# Altium PCB PCB1.PcbDoc
Units mm, origin at the board's own origin, x right, y up, seen from the top; angles counter-clockwise.
Board outline 100.08 x 100.08 mm, 2 copper layers (Top Layer, Bottom Layer); 116 components, 78 nets, 340 pads, 0 vias.
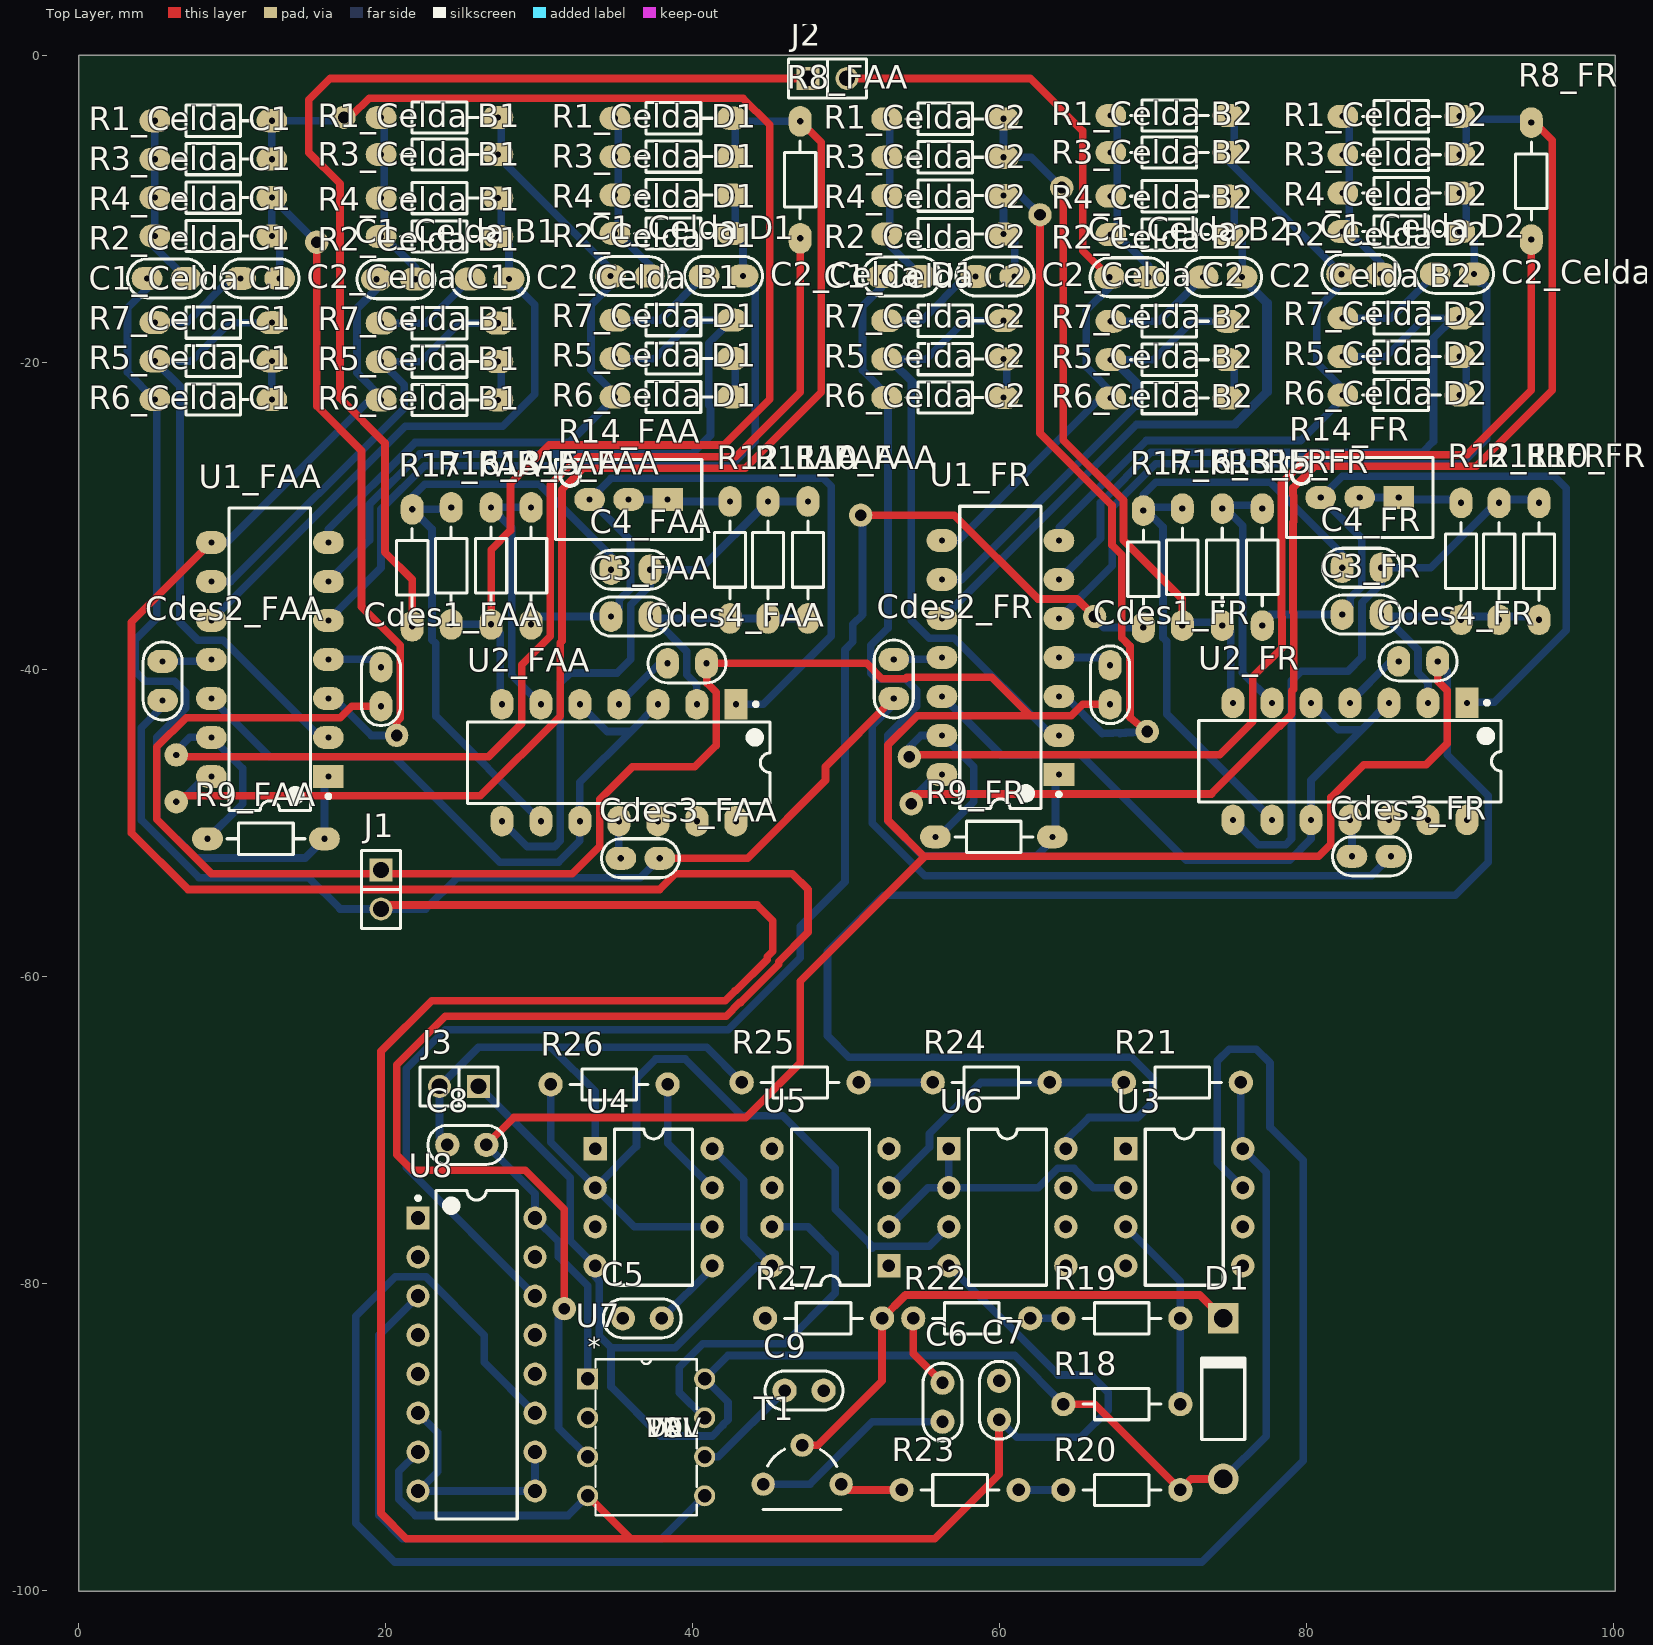
[diagram p0: Top Layer view]
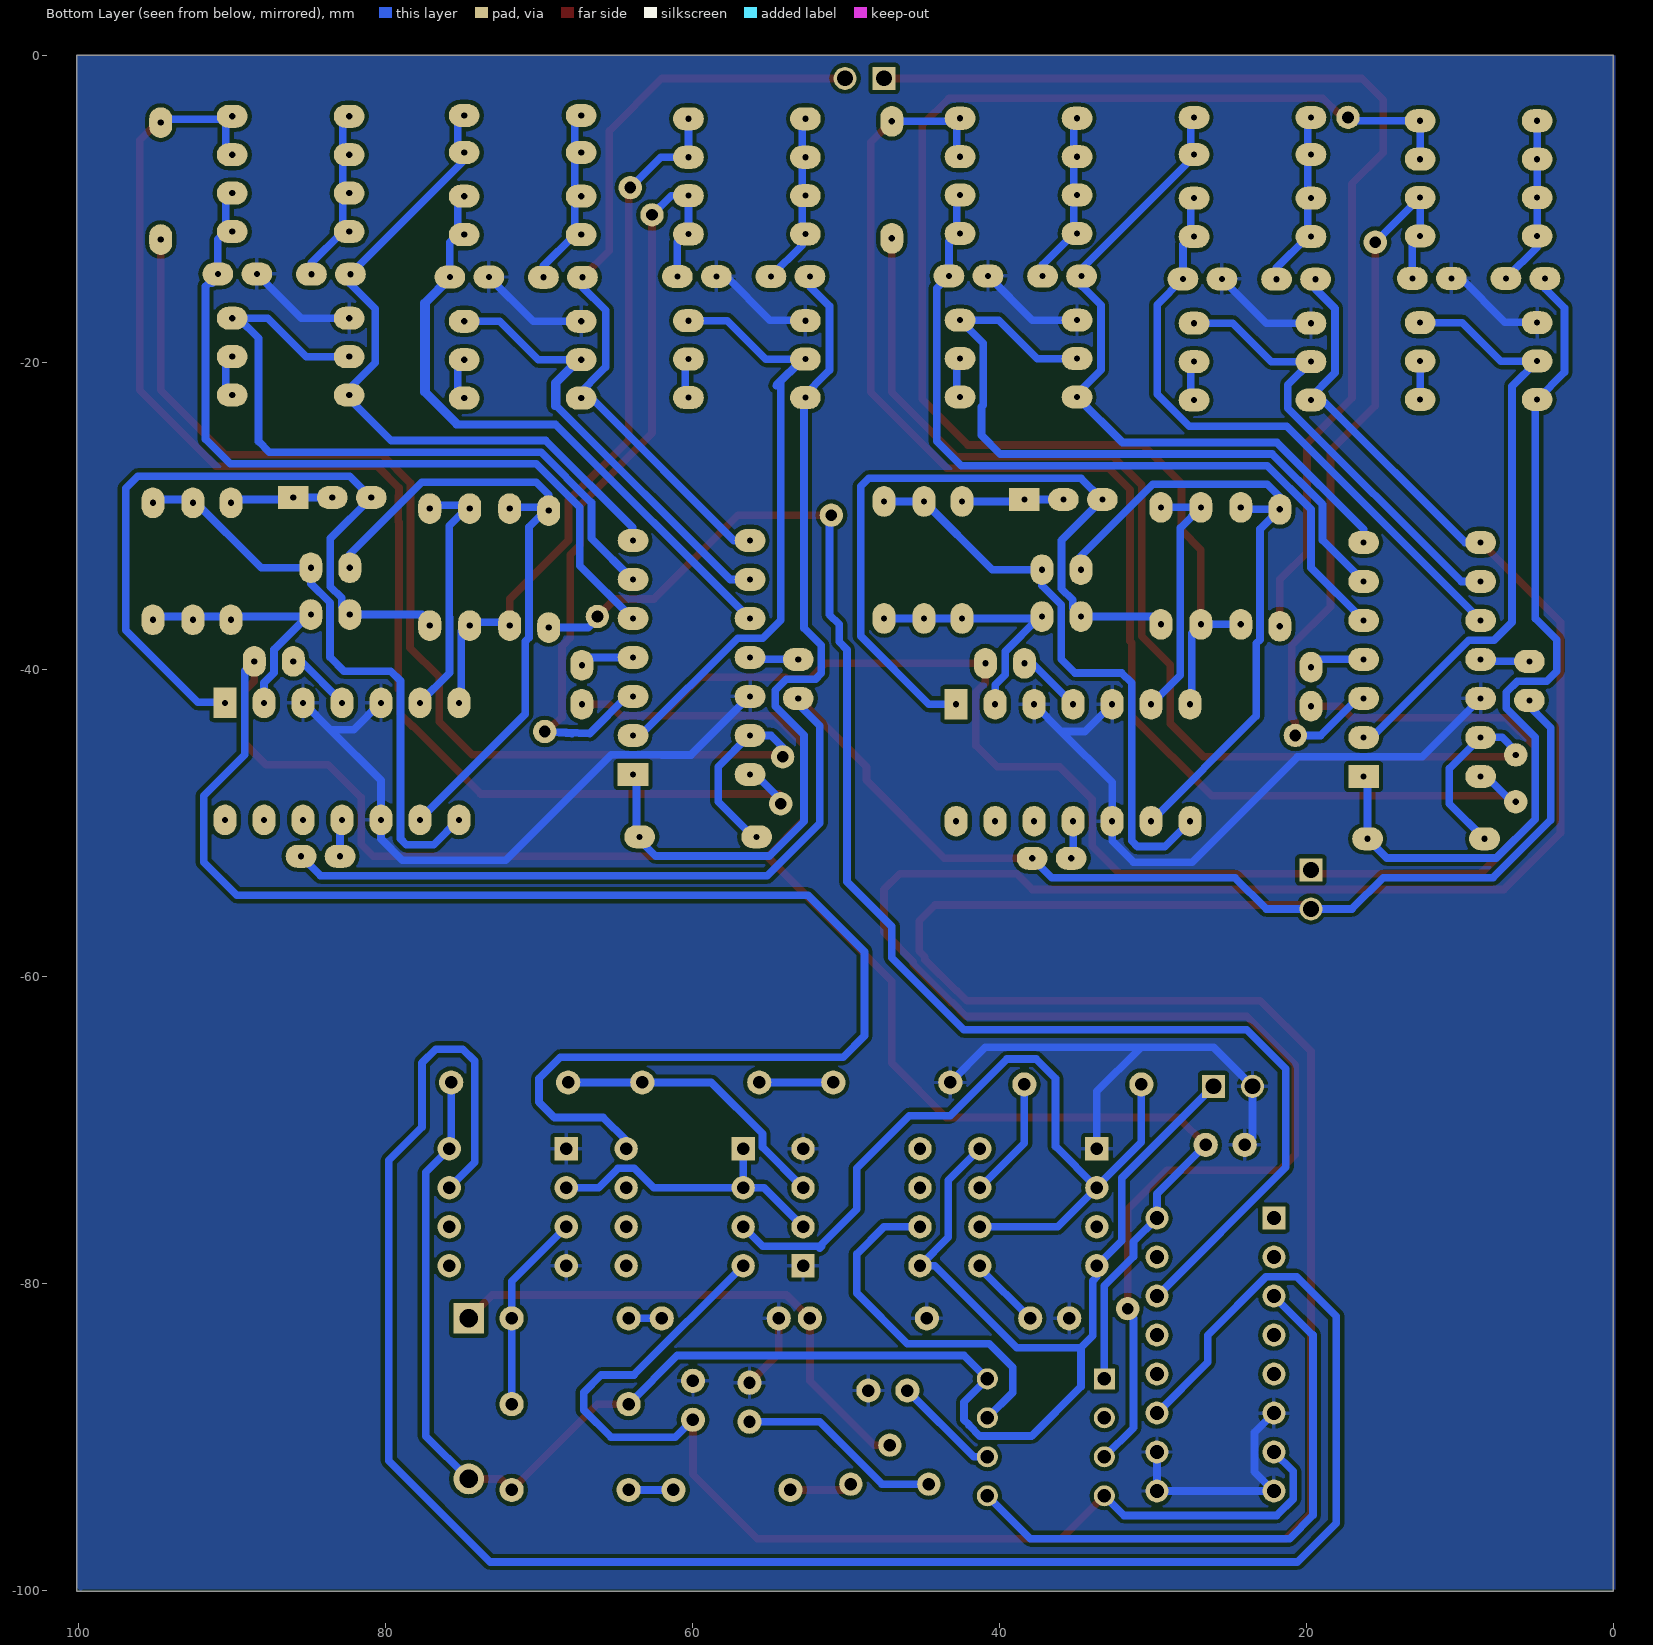
[diagram p1: Bottom Layer view, seen from below]
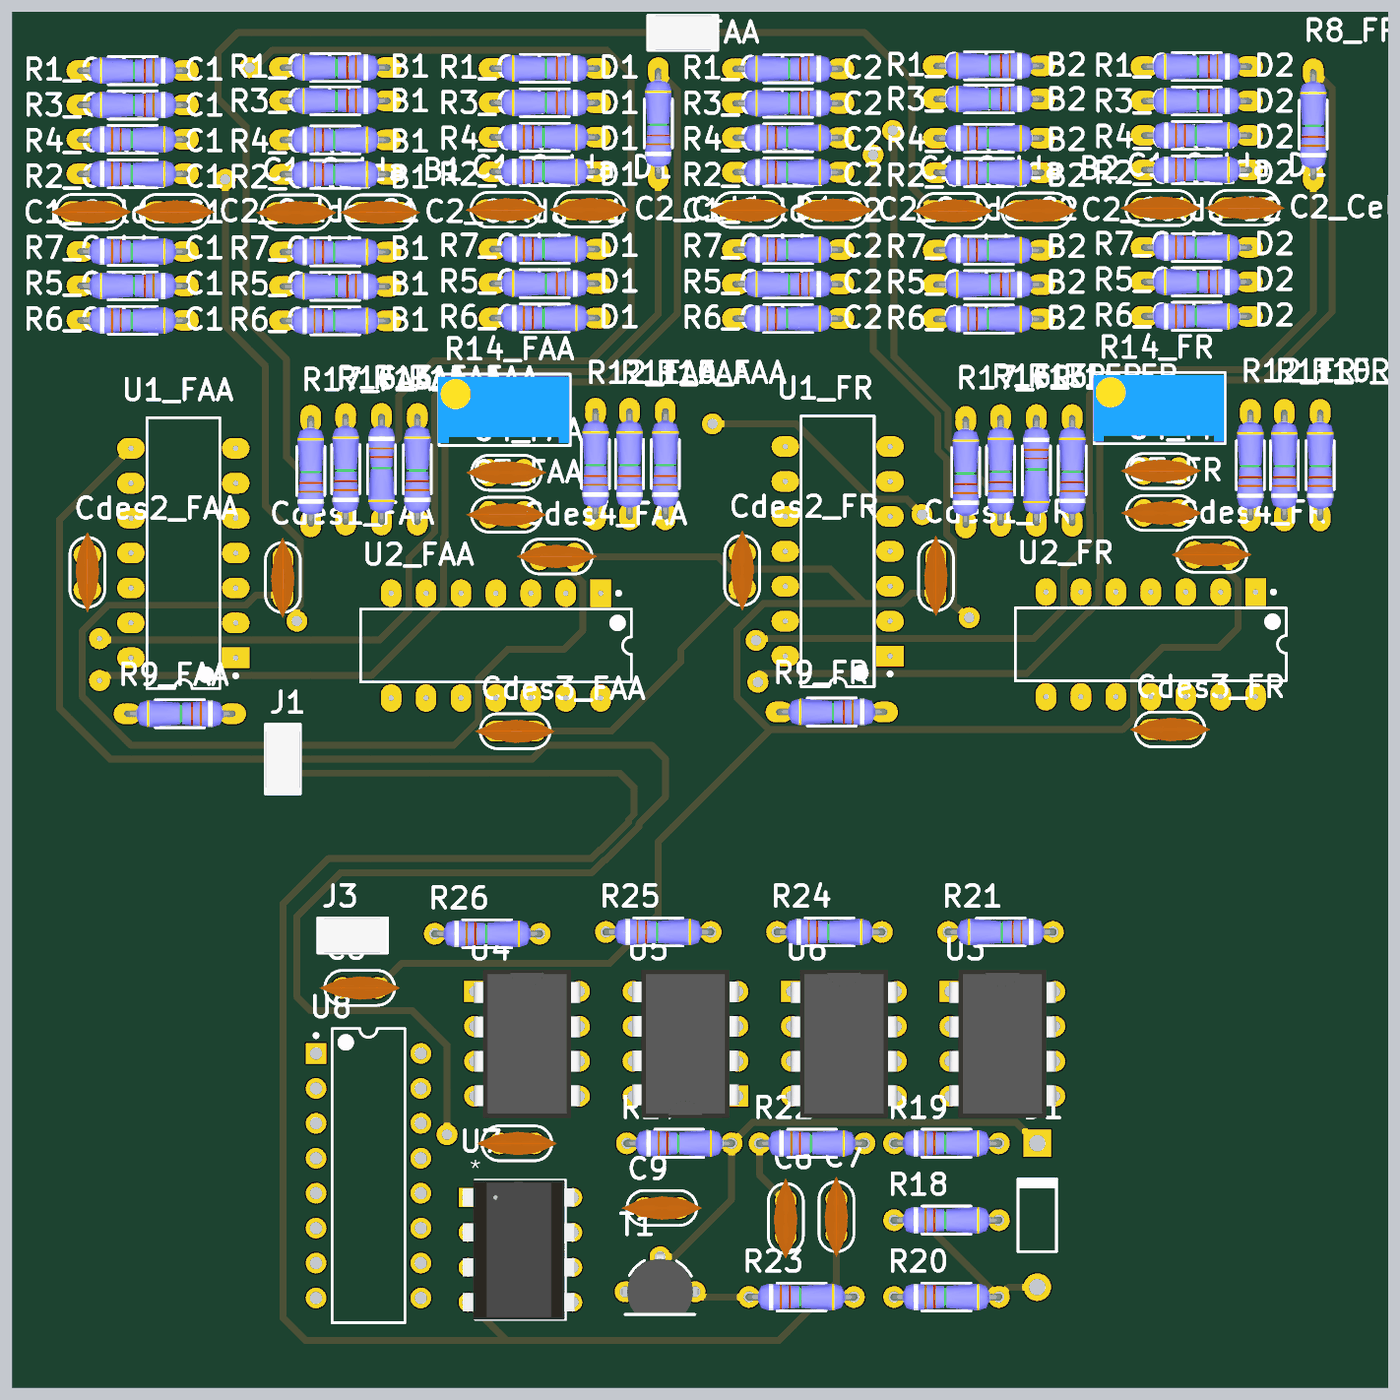
[diagram p2: 3D render of the assembled board from above, using the file's embedded part models]

## Layer stack, top to bottom
Top Solder: solder mask 0.0102, Solder Resist, Dk 3.5
Top Layer: signal copper 0.0356
Dielectric 1: dielectric 0.32, FR-4, Dk 4.8
Bottom Layer: signal copper 0.0356
Bottom Solder: solder mask 0.0102, Solder Resist, Dk 3.5

## Board outline
0,0 0,-100.076 100.076,-100.076 100.076,0

## Design rules (kind name [scope] priority, off if disabled: settings)
Clearance [All] p1: gap=0.254 ignorepadtopadclearanceinfootprint=FALSE except(0: Arc-Hole Track-Hole SMDPad-Hole THPad-Hole Via-Hole Fill-Hole Poly-Hole Region-Hole Text-Hole)
PolygonConnect [All] p1: connectstyle=Relief reliefconductorwidth=0.254 reliefentries=4 polygonreliefangle="90 Angle" airgapwidth=0.254
RoutingVias [All] p1: holewidth=0.711 width=1.27 viastyle="Through Hole" minholewidth=0.711 minwidth=1.27 maxholewidth=0.711 maxwidth=1.27
SolderMaskExpansion [All] p1: expansion=0.102
Width [All] p1: maxlimit=0.5 minlimit=0.5 preferedwidth=0.5
30 further rules are at their usual default settings.

## Classes and differential pairs
component class OSC: C5 C6 C8 D1 R18 R19 R20 R21 R22 R23 R24 R25 R26 R27 T1 U3 U4 U5 U6
component class Circuito: C9 J1 J2 J3 U7 U8
channel class Sheet1: FAA FR
component class FR: C3_FR C4_FR Cdes1_FR Cdes2_FR Cdes3_FR Cdes4_FR R8_FR R9_FR R10_FR R11_FR R12_FR R13_FR R14_FR R15_FR R16_FR R17_FR U1_FR U2_FR
component class "Celda D2": "C1_Celda D2" "C2_Celda D2" "R1_Celda D2" "R2_Celda D2" "R3_Celda D2" "R4_Celda D2" "R5_Celda D2" "R6_Celda D2" "R7_Celda D2"
component class "Celda C2": "C1_Celda C2" "C2_Celda C2" "R1_Celda C2" "R2_Celda C2" "R3_Celda C2" "R4_Celda C2" "R5_Celda C2" "R6_Celda C2" "R7_Celda C2"
component class "Celda B2": "C1_Celda B2" "C2_Celda B2" "R1_Celda B2" "R2_Celda B2" "R3_Celda B2" "R4_Celda B2" "R5_Celda B2" "R6_Celda B2" "R7_Celda B2"
component class FAA: C3_FAA C4_FAA Cdes1_FAA Cdes2_FAA Cdes3_FAA Cdes4_FAA R8_FAA R9_FAA R10_FAA R11_FAA R12_FAA R13_FAA R14_FAA R15_FAA R16_FAA R17_FAA U1_FAA U2_FAA
component class "Celda C1": "C1_Celda C1" "C2_Celda C1" "Celda C1" "R1_Celda C1" "R2_Celda C1" "R3_Celda C1" "R4_Celda C1" "R5_Celda C1" "R6_Celda C1" "R7_Celda C1"
component class "Celda B1": "C1_Celda B1" "C2_Celda B1" "R1_Celda B1" "R2_Celda B1" "R3_Celda B1" "R4_Celda B1" "R5_Celda B1" "R6_Celda B1" "R7_Celda B1"
component class "Celda D1": "C1_Celda D1" "C2_Celda D1" "R1_Celda D1" "R2_Celda D1" "R3_Celda D1" "R4_Celda D1" "R5_Celda D1" "R6_Celda D1" "R7_Celda D1"
channel class SallenKeyLowPass: "Celda B1" "Celda B2" "Celda C1" "Celda C2" "Celda D1" "Celda D2" FAA FR

## Components (designator, comment, footprint, x,y, rotation, side; value= is the part's Value field where it differs from the comment)
"C1_Celda B1" "CAP" CAP100#1 20.66,-14.605 r180 top (schematic designator C1)
"C1_Celda B2" "CAP" CAP100#1 68.412,-14.478 r180 top (schematic designator C1)
"C1_Celda C1" "CAP" CAP100#1 5.715,-14.551 r180 top (schematic designator C1)
"C1_Celda C2" "CAP" CAP100#1 53.594,-14.424 r180 top (schematic designator C1)
"C1_Celda D1" "CAP" CAP100#1 35.9,-14.405 r180 top (schematic designator C1)
"C1_Celda D2" "CAP" CAP100#1 83.525,-14.278 r180 top (schematic designator C1)
"C2_Celda B1" "CAP" CAP100#1 26.756,-14.587 r180 top (schematic designator C2)
"C2_Celda B2" "CAP" CAP100#1 74.508,-14.46 r180 top (schematic designator C2)
"C2_Celda C1" "CAP" CAP100#1 11.811,-14.551 r180 top (schematic designator C2)
"C2_Celda C2" "CAP" CAP100#1 59.69,-14.424 r180 top (schematic designator C2)
"C2_Celda D1" "CAP" CAP100#1 41.996,-14.387 r180 top (schematic designator C2)
"C2_Celda D2" "CAP" CAP100#1 89.621,-14.26 r180 top (schematic designator C2)
C3_FAA "CAP" CAP100#2 35.941,-36.576 r180 top (schematic designator C3)
C3_FR "CAP" CAP100#2 83.566,-36.449 r180 top (schematic designator C3)
C4_FAA "CAP" CAP100#2 35.941,-33.528 r0 top (schematic designator C4)
C4_FR "CAP" CAP100#2 83.566,-33.401 r0 top (schematic designator C4)
C5 "CAP" CAP100#3 36.703,-82.296 r180 top
C6 "CAP" CAP100#3 56.261,-87.757 r90 top
C7 "CAP" CAP100#3 59.944,-87.63 r90 top
C8 "CAP" CAP100#3 25.273,-70.993 r180 top
C9 "CAP" CAP100#3 47.244,-86.995 r180 top
Cdes1_FAA "CAP" CAP100#1 19.685,-41.148 r90 top (schematic designator Cdes1)
Cdes1_FR "CAP" CAP100#1 67.183,-41.021 r90 top (schematic designator Cdes1)
Cdes2_FAA "CAP" CAP100#2 5.461,-40.767 r270 top (schematic designator Cdes2)
Cdes2_FR "CAP" CAP100#2 53.086,-40.64 r270 top (schematic designator Cdes2)
Cdes3_FAA "CAP" CAP100#1 36.576,-52.324 r180 top (schematic designator Cdes3)
Cdes3_FR "CAP" CAP100#1 84.201,-52.197 r180 top (schematic designator Cdes3)
Cdes4_FAA "CAP" CAP100#2 39.624,-39.624 r0 top (schematic designator Cdes4)
Cdes4_FR "CAP" CAP100#2 87.249,-39.497 r0 top (schematic designator Cdes4)
D1 "Diode 1N4003" DO-41 74.549,-87.526 r90 top
J1 "JUMPER" JUMPER2 19.685,-54.356 r270 top
J2 "JUMPER" JUMPER2 48.768,-1.524 r0 top
J3 "JUMPER" JUMPER2 24.765,-67.183 r180 top
"R1_Celda B1" "RES" RES300#1 27.305,-4.064 r180 top (schematic designator R1)
"R1_Celda B2" "RES" RES300#1 74.844,-3.937 r180 top (schematic designator R1)
"R1_Celda C1" "RES" RES300#1 12.573,-4.282 r180 top (schematic designator R1)
"R1_Celda C2" "RES" RES300#1 60.239,-4.155 r180 top (schematic designator R1)
"R1_Celda D1" "RES" RES300#1 42.545,-4.118 r180 top (schematic designator R1)
"R1_Celda D2" "RES" RES300#1 89.957,-3.991 r180 top (schematic designator R1)
"R2_Celda B1" "RES" RES300#1 19.685,-11.829 r0 top (schematic designator R2)
"R2_Celda B2" "RES" RES300#1 67.224,-11.702 r0 top (schematic designator R2)
"R2_Celda C1" "RES" RES300#1 4.953,-11.793 r0 top (schematic designator R2)
"R2_Celda C2" "RES" RES300#1 52.619,-11.666 r0 top (schematic designator R2)
"R2_Celda D1" "RES" RES300#1 34.925,-11.63 r0 top (schematic designator R2)
"R2_Celda D2" "RES" RES300#1 82.337,-11.503 r0 top (schematic designator R2)
"R3_Celda B1" "RES" RES300#1 27.305,-6.477 r180 top (schematic designator R3)
"R3_Celda B2" "RES" RES300#1 74.844,-6.35 r180 top (schematic designator R3)
"R3_Celda C1" "RES" RES300#1 12.573,-6.785 r180 top (schematic designator R3)
"R3_Celda C2" "RES" RES300#1 60.239,-6.658 r180 top (schematic designator R3)
"R3_Celda D1" "RES" RES300#1 42.545,-6.622 r180 top (schematic designator R3)
"R3_Celda D2" "RES" RES300#1 89.957,-6.495 r180 top (schematic designator R3)
"R4_Celda B1" "RES" RES300#1 19.685,-9.325 r0 top (schematic designator R4)
"R4_Celda B2" "RES" RES300#1 67.224,-9.198 r0 top (schematic designator R4)
"R4_Celda C1" "RES" RES300#1 4.953,-9.289 r0 top (schematic designator R4)
"R4_Celda C2" "RES" RES300#1 52.619,-9.162 r0 top (schematic designator R4)
"R4_Celda D1" "RES" RES300#1 34.925,-9.126 r0 top (schematic designator R4)
"R4_Celda D2" "RES" RES300#1 82.337,-8.999 r0 top (schematic designator R4)
"R5_Celda B1" "RES" RES300#1 27.305,-19.975 r180 top (schematic designator R5)
"R5_Celda B2" "RES" RES300#1 74.844,-19.848 r180 top (schematic designator R5)
"R5_Celda C1" "RES" RES300#1 12.573,-19.939 r180 top (schematic designator R5)
"R5_Celda C2" "RES" RES300#1 60.239,-19.812 r180 top (schematic designator R5)
"R5_Celda D1" "RES" RES300#1 42.545,-19.776 r180 top (schematic designator R5)
"R5_Celda D2" "RES" RES300#1 89.957,-19.649 r180 top (schematic designator R5)
"R6_Celda B1" "RES" RES300#1 19.685,-22.479 r0 top (schematic designator R6)
"R6_Celda B2" "RES" RES300#1 67.224,-22.352 r0 top (schematic designator R6)
"R6_Celda C1" "RES" RES300#1 4.953,-22.443 r0 top (schematic designator R6)
"R6_Celda C2" "RES" RES300#1 52.619,-22.316 r0 top (schematic designator R6)
"R6_Celda D1" "RES" RES300#1 34.925,-22.279 r0 top (schematic designator R6)
"R6_Celda D2" "RES" RES300#1 82.337,-22.152 r0 top (schematic designator R6)
"R7_Celda B1" "RES" RES300#1 19.685,-17.472 r0 top (schematic designator R7)
"R7_Celda B2" "RES" RES300#1 67.224,-17.345 r0 top (schematic designator R7)
"R7_Celda C1" "RES" RES300#1 4.953,-17.435 r0 top (schematic designator R7)
"R7_Celda C2" "RES" RES300#1 52.619,-17.308 r0 top (schematic designator R7)
"R7_Celda D1" "RES" RES300#1 34.925,-17.272 r0 top (schematic designator R7)
"R7_Celda D2" "RES" RES300#1 82.337,-17.145 r0 top (schematic designator R7)
R8_FAA "RES" RES300#1 46.99,-11.938 r90 top (schematic designator R8)
R8_FR "RES" RES300#1 94.615,-12.024 r90 top (schematic designator R8)
R9_FAA "RES" RES300#1 16.002,-51.054 r180 top (schematic designator R9)
R9_FR "RES" RES300#1 63.414,-50.927 r180 top (schematic designator R9)
R10_FAA "RES" RES300#1 47.498,-36.703 r90 top (schematic designator R10)
R10_FR "RES" RES300#1 95.123,-36.789 r90 top (schematic designator R10)
R11_FAA "RES" RES300#1 44.895,-36.703 r90 top (schematic designator R11)
R11_FR "RES" RES300#1 92.519,-36.789 r90 top (schematic designator R11)
R12_FAA "RES" RES300#1 42.418,-36.703 r90 top (schematic designator R12)
R12_FR "RES" RES300#1 90.043,-36.789 r90 top (schematic designator R12)
R13_FAA "RES" RES300#1 26.86,-29.464 r270 top (schematic designator R13)
R13_FR "RES" RES300#1 74.486,-29.55 r270 top (schematic designator R13)
R14_FAA "PRESET" "PRESET V" 35.814,-28.956 r180 top (schematic designator R14)
R14_FR "PRESET" "PRESET V" 83.439,-28.829 r180 top (schematic designator R14)
R15_FAA "RES" RES300#1 29.464,-37.084 r90 top (schematic designator R15)
R15_FR "RES" RES300#1 77.089,-37.17 r90 top (schematic designator R15)
R16_FAA "RES" RES300#1 24.257,-37.084 r90 top (schematic designator R16)
R16_FR "RES" RES300#1 71.882,-37.17 r90 top (schematic designator R16)
R17_FAA "RES" RES300#1 21.717,-37.211 r90 top (schematic designator R17)
R17_FR "RES" RES300#1 69.342,-37.297 r90 top (schematic designator R17)
R18 "RES" RES300#2 64.135,-87.884 r0 top
R19 "RES" RES300#2 64.135,-82.296 r0 top
R20 "RES" RES300#2 64.135,-93.472 r0 top
R21 "RES" RES300#2 75.692,-66.929 r180 top
R22 "RES" RES300#2 54.356,-82.296 r0 top
R23 "RES" RES300#2 53.594,-93.472 r0 top
R24 "RES" RES300#2 55.626,-66.929 r0 top
R25 "RES" RES300#2 43.18,-66.929 r0 top
R26 "RES" RES300#2 30.734,-67.056 r0 top
R27 "RES" RES300#2 44.704,-82.296 r0 top
T1 "TRANSISTOR PNP" TO92 47.117,-91.821 r180 top
U1_FAA "TL084CN" TI-N14 12.446,-39.37 r180 top (schematic designator U1)
U1_FR "TL084CN" TI-N14 60.034,-39.243 r180 top (schematic designator U1)
U2_FAA "TL084CN" TI-N14 35.179,-46.101 r270 top (schematic designator U2)
U2_FR "TL084CN" TI-N14 82.804,-46.011 r270 top (schematic designator U2)
U3 "IC_DIP8" DIP8 68.199,-71.247 r0 top
U4 "LM555" DIP8 33.632,-71.247 r0 top
U5 "IC_DIP8" DIP8 52.774,-78.867 r180 top
U6 "LM833" DIP8 56.677,-71.247 r0 top
U7 "LF398_N_P_8" P8 40.767,-93.853 r0 top value=Value
U8 "CD4051B_D_16" D16 25.908,-84.653 r0 top value=Value

## Footprints (in the part's own frame and the unit in brackets; to place one, negate y for a bottom-side part, rotate by r counter-clockwise, add the part's x,y. Pads: shape width x height; smd on the part's side, far side on the other; paste and mask are expansions set on the pad)
CAP100#1 [mm]
  oval 2x1.5 hole 0.4: 1(-1.27,0) 2(1.27,0)
  silkscreen extent -2.54,-1.27 2.54,1.27, body extent -2.92,-0.84 2.92,0.86, height 6.12
CAP100#2 [mm]
  oval 1.5x2 hole 0.4: 1(-1.27,0) 2(1.27,0)
  silkscreen extent -2.54,-1.27 2.54,1.27, body extent -2.92,-0.84 2.92,0.86, height 6.12
CAP100#3 [mm]
  round 1.575 hole 0.813: 1(-1.27,0) 2(1.27,0)
  silkscreen extent -2.54,-1.27 2.54,1.27, body extent -2.92,-0.84 2.92,0.86, height 6.12
D16 [mm] "DIP, 16-Leads, Row Spacing 7.62mm, Pitch 2.54mm, Body 20.07x7.37mm"
  rect 1.5x1.5 hole 0.9: 1(-3.81,8.89)
  round 1.5 hole 0.9: 2(-3.81,6.35) 3(-3.81,3.81) 4(-3.81,1.27) 5(-3.81,-1.27) 6(-3.81,-3.81) 7(-3.81,-6.35) 8(-3.81,-8.89) 9(3.81,-8.89) 10(3.81,-6.35) 11(3.81,-3.81) 12(3.81,-1.27) 13(3.81,1.27) 14(3.81,3.81) 15(3.81,6.35) 16(3.81,8.89)
  silkscreen extent -3.93,-10.7 2.65,10.7, body extent -3.6,-10.68 3.6,10.68, height 4.2
DIP8 [mil]
  rect 60x60 hole 32: 1(0,0)
  round 60 hole 32: 2(0,-100) 3(0,-200) 4(0,-300) 5(300,-300) 6(300,-200) 7(300,-100) 8(300,0)
  silkscreen extent 50,-350 250,50, body extent -3,-363 303,63, height 177
DO-41 [mm] "Diode, Axial; Body 5.2 x 2.7 mm (LxDia. max), Lead Dia. 0.86 mm (max)"
  round 2 hole 1.2: 1(-5.23,0)
  rect 2x2 hole 1.2: 2(5.23,0)
  silkscreen extent -2.65,-1.4 2.75,1.4
JUMPER2 [mm]
  rect 1.5x1.5 hole 1.016: 1(-1.27,0)
  round 1.5 hole 1.016: 2(1.27,0)
  silkscreen extent -2.54,-1.27 2.54,1.27, body extent -2.46,-1.27 2.54,1.27, height 9.5
P8 [mil]
  rect 54x54 / inner round 60 / far side rect 54x54 hole 34: 1(-300,300)
  round 54 / inner round 60 / far side round 54 hole 34: 2(-300,200) 3(-300,100) 4(-300,0) 5(0,0) 6(0,100) 7(0,200) 8(0,300)
  silkscreen extent -280,-50 -20,350, body extent -315,-50 5,350, height 300
"PRESET V" [mm]
  rect 2x1.5 hole 0.4: 1(-2.54,0)
  oval 2x1.5 hole 0.4: 2(0,0) 3(2.54,0)
  silkscreen extent -4.76,-2.6 4.76,2.6, body extent -4.7,-2.42 4.83,2.42, height 11.55
RES300#1 [mm]
  oval 2x1.5 hole 0.4: 1(0,0) 2(7.62,0)
  silkscreen extent 1.27,-1.02 6.35,1.02, body extent -0.25,-0.97 7.87,0.97, height 2.01
RES300#2 [mm]
  round 1.575 hole 0.813: 1(0,0) 2(7.62,0)
  silkscreen extent 1.27,-1.02 6.35,1.02, body extent -0.25,-0.97 7.87,0.97, height 2.01
TI-N14 [mm] "DIP, 14-Leads, Body 19.305x6.35 mm, Pitch 2.54 mm"
  rect 2x1.5 hole 0.4: 1(-3.81,7.62)
  oval 2x1.5 hole 0.4: 2(-3.81,5.08) 3(-3.81,2.54) 4(-3.81,0) 5(-3.81,-2.54) 6(-3.81,-5.08) 7(-3.81,-7.62) 8(3.81,-7.62) 9(3.81,-5.08) 10(3.81,-2.54) 11(3.81,0) 12(3.81,2.54) 13(3.81,5.08) 14(3.81,7.62)
  silkscreen extent -3.94,-9.85 2.65,9.85, body extent -3.3,-9.85 3.3,9.85, height 5.08
TO92 [mil]
  round 60 hole 32: 1(0,-50) 2(100,50) 3(-100,50)
  silkscreen extent -100,-39 100,115, body extent -110,-61 110,110, height 315

## Part data
D1: "1 Amp General Purpose Rectifier", Code_JEDEC=DO-204-AL, ComponentLink1Description="Manufacturer Link", ComponentLink1URL=http://www.fairchildsemi.com/, ComponentLink2Description=Datasheet, ComponentLink2URL=http://www.fairchildsemi.com/ds/1N%2F1N4001.pdf, DatasheetVersion=1998, LatestRevisionDate=17-Jul-2002, LatestRevisionNote="Re-released for DXP Platform.", PackageDescription="Diode, Axial; Body 5.2 x 2.7 mm (LxDia. max), Lead Dia. 0.86 mm (max)", PackageReference=DO-41, PackageVersion=Aug-1999, Published=8-Jun-2000, Publisher="Altium Limited"
U1_FAA U1_FR U2_FAA U2_FR: "JFET-Input Operational Amplifier, 7 to 36 V, 0 to 70 degC, 14-pin DIP (N14), Pb-Free (RoHS)", Manufacturer="Texas Instruments", Rating=Catalog, Supplier Part Number 1=296-1784-5-ND, Total Supply Voltage(Max)(+5V is 5, +/-5V is 10)=36, Total Supply Voltage(Min)(+5V is 5, +/-5V is 10)=7, CMRR(Min)(dB)=70, Code_JEDEC=MS-001, ComponentLink1Description="Manufacturer URL", ComponentLink1URL=http://www.ti.com/, ComponentLink2Description=Datasheet, ComponentLink2URL=http://www.ti.com/lit/ds/symlink/tl084.pdf, ComponentLink3Description="Package Specification", ComponentLink3URL=http://www.ti.com/lit/ml/mpdi002c/mpdi002c.pdf, DatasheetVersion=SLOS081G, Eco-Plan="Pb-Free (RoHS)", GBW(Typ)(MHz)=3, IIB(Max)(pA)=400, Iq per channel(Max)(mA)=2.8, Mounting Technology="Through Hole", Number of Channels=4, Offset Drift(Typ)(uV/C)=18, PackageDescription="14-Pin Plastic In-Line, Body 19.305 x 6.35 mm, Pitch 2.54 mm", PackageReference=N14, PackageVersion="4040049/E, 12/2002", PartNumber=TL084CN, Slew Rate(Typ)(V/us)=13, Sub Family="General Purpose Amplifier, High Supply Voltage Amplifier (>=30V)", Supplier 1=Digi-Key, Supplier 2=Farnell, Supplier 3=Newark, Supplier 4=Mouser, Supplier Part Number 2=1106020, Supplier Part Number 3=08F9374, Supplier Part Number 4=595-TL084CN, Vio (25C)(Max)(mV)=15, Vn at 1kHz(Typ)(nV/rtHz)=18
U4: "Timer"
U6: "Dual Audio Operational Amplifier"
U7: "Imported", Manufacturer_Part_Number=lf398-n_p_8, RefDes=RefDes, Type=Type, Vendor="Texas Instruments"
U8: "Imported", Manufacturer="Texas Instruments", PACKAGE_DESIGNATOR=D, Datasheet_URL=http://www.ti.com/lit/gpn/CD4051B, FAMILY_NAME="ANALOG SWITCH/MULTIPLEXER (greater than 5V)", GENERIC_PART_NUMBER=CD4051B, INDUSTRY_STD_PKG_TYPE=SOIC, PIN_COUNT=16, RefDes=RefDes, Type=Type

## Free pads (board coordinates)
  round 1.524 hole 0.4: 2(6.35,-45.593) 3(6.35,-48.641)
  round 1.524 hole 0.762: 4(17.272,-4.064) 5(15.494,-12.192) 6(20.701,-44.323) 10(54.229,-48.768) 11(54.102,-45.72) 14(69.596,-44.069) 16(62.611,-10.414) 17(64.026,-8.636) 20(50.927,-29.972) 21(66.167,-36.576) 22(31.623,-81.661)

## Nets (pads, with @x,y where several pads share a name; then routed paths per layer and width w, separated by ;. In a path a pad name is that pad's centre, name@x,y a point inside that pad or via, vN(x,y) a via of type N, cw(c..) or ccw(c..) an arc to the next point about the centre after c; other vN are vias at no path point)
+5V: D1.1 J3.1 R18.1 R20.2 R21.1 U3.8 U4.4 U4.8 U5.8 U7.8 | length 123.8
  Top Layer w0.5: R18.1 66.167,-87.884 R20.2 72.471,-92.756 D1.1
  Bottom Layer w0.5: J3.1 32.004,-73.152 32.004,-77.239 U4.4 33.632,-79.591 33.901,-79.86 33.901,-83.431 34.671,-84.201 ; U4.8 43.307,-73.302 43.307,-77.02 U5.8 44.196,-78.867 38.862,-84.201 34.671,-84.201 ; R18.1 60.96,-84.709 42.291,-84.709 U7.8 42.291,-87.757 42.291,-88.9 41.957,-89.234 41.957,-89.266 41.26,-89.963 37.893,-89.963 34.671,-86.741 34.671,-84.201 ; D1.1 77.343,-89.962 77.343,-72.771 U3.8 75.692,-71.12 R21.1
+rail2_FAA: Cdes4_FAA.1 U2_FAA.4 | length 4.3
  Bottom Layer w0.5: U2_FAA.4 37.846,-39.624 Cdes4_FAA.1
+rail2_FR: Cdes4_FR.1 U2_FR.4 | length 4.3
  Bottom Layer w0.5: U2_FR.4@82.804,-42.164 85.471,-39.497 Cdes4_FR.1
+rail_FAA: Cdes1_FAA.2 U1_FAA.4 | length 3.4
  Bottom Layer w0.5: U1_FAA.4 19.431,-39.37 Cdes1_FAA.2@19.558,-39.497
+rail_FR: Cdes1_FR.2 U1_FR.4 | length 3.4
  Bottom Layer w0.5: U1_FR.4@63.881,-39.243 67.056,-39.243 Cdes1_FR.2@67.183,-39.37
-rail2_FAA: Cdes3_FAA.2 U2_FAA.11 | length 2.5
  Bottom Layer w0.5: U2_FAA.11 35.179,-52.197 Cdes3_FAA.2
-rail2_FR: Cdes3_FR.2 U2_FR.11 | length 1.6
  Bottom Layer w0.5: Cdes3_FR.2 U2_FR.11@82.931,-50.575
-rail_FAA: Cdes2_FAA.1 U1_FAA.11 | length 2.8
  Bottom Layer w0.5: Cdes2_FAA.1@5.842,-39.497 8.509,-39.497 U1_FAA.11
-rail_FR: Cdes2_FR.1 U1_FR.11 | length 2.8
  Bottom Layer w0.5: Cdes2_FR.1@53.467,-39.37 56.134,-39.37 U1_FR.11@56.261,-39.243
control: U3.7 U8.11 | length 136.3
  Bottom Layer w0.5: U8.11 26.416,-85.161 26.416,-83.388 22.617,-79.589 20.614,-79.589 18.034,-82.169 18.034,-95.631 20.574,-98.171 73.152,-98.171 79.756,-91.567 79.756,-72.009 77.597,-69.85 77.597,-65.659 76.708,-64.77 74.93,-64.77 74.168,-65.532 74.168,-72.136 U3.7
Ground_FAA: "C2_Celda B1.2" "C2_Celda B2.2" "C2_Celda C1.2" "C2_Celda C2.2" "C2_Celda D1.2" "C2_Celda D2.2" "R7_Celda B1.1" "R7_Celda B2.1" "R7_Celda C1.1" "R7_Celda C2.1" "R7_Celda D1.1" "R7_Celda D2.1" C5.2 C6.2 C7.2 C8.2 C9.1 J3.2 R22.1 R25.1 R27.1 U1_FAA.12 U1_FR.12 U2_FAA.3 U2_FAA.5 U2_FAA.10 U2_FR.3 U2_FR.5 U2_FR.10 U3.1 U3.4 U4.1 U5.1 U5.4 U8.6 U8.8 U8.9 U8.10 | length 183.4
  Top Layer w0.5: R22.1 54.356,-84.582 C6.2
  Bottom Layer w0.5: 4.953,-17.435 5.298,-17.435 5.334,-17.399 7.058,-17.399 9.906,-14.551 10.541,-14.551 ; U1_FAA.12 12.446,-45.72 14.357,-45.72 14.373,-45.704 20.558,-45.704 27.432,-52.578 31.242,-52.578 32.639,-51.181 U2_FAA.10 32.639,-47.371 35.941,-44.069 ; 19.898,-17.472 22.601,-17.472 25.486,-14.587 ; U8.6 23.368,-89.733 23.368,-92.273 U8.8 U8.9 U8.10 ; C8.2 23.495,-70.485 J3.2 26.035,-64.643 40.894,-64.643 R25.1 ; 30.878,-64.753 33.632,-67.508 U4.1 ; U2_FAA.5 34.417,-44.069 35.941,-44.069 ; 35.138,-17.272 37.841,-17.272 40.726,-14.387 ; U2_FAA.3 35.941,-44.069 ; 52.832,-17.308 53.177,-17.308 53.213,-17.272 54.937,-17.272 57.785,-14.424 58.42,-14.424 ; U1_FR.12@56.261,-41.783 60.071,-45.593 61.982,-45.593 61.998,-45.577 65.262,-45.577 72.136,-52.451 78.867,-52.451 80.264,-51.054 U2_FR.10 80.264,-47.244 83.566,-43.942 ; 67.65,-17.345 70.353,-17.345 73.238,-14.46 ; U2_FR.5@80.264,-42.164 82.042,-43.942 83.566,-43.942 ; 82.763,-17.145 85.466,-17.145 88.351,-14.26 ; U2_FR.3@85.344,-42.164 83.566,-43.942
"NetC1_Celda B1_1": "C1_Celda B1.1" "R1_Celda B1.2" "R2_Celda B1.1" "R3_Celda B1.2" "R4_Celda B1.1" | length 11.1
  Bottom Layer w0.5: 19.898,-4.318 19.898,-11.829 21.93,-13.861 21.93,-14.587
"NetC1_Celda B1_2": "C1_Celda B1.2" "R6_Celda B1.1" pad.22 U1_FAA.8 U7.3 | length 159.7
  Top Layer w0.5: U1_FAA.8 3.429,-36.957 3.429,-50.673 7.112,-54.356 37.837,-54.356 38.853,-53.34 46.482,-53.34 47.498,-54.356 47.498,-57.15 45.593,-59.055 45.593,-59.232 43.111,-61.714 43.061,-61.714 42.164,-62.611 23.876,-62.611 20.701,-65.786 20.701,-71.628 21.717,-72.644 29.083,-72.644 31.623,-75.184 pad.22
  Bottom Layer w0.5: U1_FAA.8 9.652,-31.75 18.923,-22.479 19.685,-22.479 ; 19.39,-14.587 19.39,-14.605 19.39,-15.24 18.12,-16.51 18.12,-20.701 19.898,-22.479 ; pad.22@31.496,-82.042 31.242,-82.296 31.242,-89.408 U7.3
"NetC1_Celda B2_1": "C1_Celda B2.1" "R1_Celda B2.2" "R2_Celda B2.1" "R3_Celda B2.2" "R4_Celda B2.1" | length 11.1
  Bottom Layer w0.5: 67.65,-4.191 67.65,-11.702 69.682,-13.734 69.682,-14.46
"NetC1_Celda B2_2": "C1_Celda B2.2" "R6_Celda B2.1" J2.2 U1_FR.8 | length 51.4
  Top Layer w0.5: J2.2 61.976,-1.524 65.405,-4.953 65.405,-12.741 67.142,-14.478
  Bottom Layer w0.5: U1_FR.8@56.261,-31.623 57.277,-31.623 66.548,-22.352 67.224,-22.352 67.437,-22.352 ; 67.142,-14.46 67.142,-14.478 67.142,-15.113 65.618,-16.637 65.618,-20.32 67.65,-22.352
"NetC1_Celda C1_1": "C1_Celda C1.1" "R1_Celda C1.2" "R2_Celda C1.1" "R3_Celda C1.2" "R4_Celda C1.1" | length 11.1
  Bottom Layer w0.5: 4.953,-4.282 4.953,-6.785 4.953,-9.289 4.953,-11.793 4.953,-12.519 6.985,-14.551
"NetC1_Celda C1_2": "C1_Celda C1.2" "R6_Celda C1.1" R9_FAA.1 U1_FAA.1 | length 57
  Bottom Layer w0.5: 4.445,-14.551 4.445,-15.204 3.175,-16.474 3.175,-20.665 4.953,-22.443 5.08,-22.57 5.08,-36.703 3.683,-38.1 3.683,-40.132 4.334,-40.783 6.23,-40.783 6.965,-41.518 6.965,-42.556 5.08,-44.441 5.08,-49.775 7.613,-52.308 14.748,-52.308 R9_FAA.1 16.002,-47.244 U1_FAA.1
"NetC1_Celda C2_1": "C1_Celda C2.1" "R1_Celda C2.2" "R2_Celda C2.1" "R3_Celda C2.2" "R4_Celda C2.1" | length 11.1
  Bottom Layer w0.5: 52.832,-4.155 52.832,-9.162 52.832,-12.392 54.864,-14.424
"NetC1_Celda C2_2": "C1_Celda C2.2" "R6_Celda C2.1" R9_FR.1 U1_FR.1 | length 57.1
  Bottom Layer w0.5: 52.324,-14.424 52.324,-15.077 51.054,-16.347 51.054,-20.538 52.959,-22.443 ; 52.705,-22.443 52.705,-37.338 51.582,-38.461 51.582,-40.279 51.959,-40.656 53.855,-40.656 54.59,-41.391 54.59,-42.429 52.705,-44.314 52.705,-49.911 54.975,-52.181 62.373,-52.181 63.627,-50.927 63.627,-47.117 U1_FR.1@63.881,-46.863 ; 52.873,-22.406 53,-22.533
"NetC1_Celda D1_1": "C1_Celda D1.1" "R1_Celda D1.2" "R2_Celda D1.1" "R3_Celda D1.2" "R4_Celda D1.1" | length 11.1
  Bottom Layer w0.5: 35.138,-4.118 35.138,-11.63 37.17,-13.662 37.17,-14.387
"NetC1_Celda D1_2": "C1_Celda D1.2" "R1_Celda B1.1" "R3_Celda B1.1" "R6_Celda D1.1" U1_FAA.7 | length 45.8
  Bottom Layer w0.5: U1_FAA.7 16.256,-30.887 21.902,-25.241 31.963,-25.241 34.925,-22.279 34.617,-22.279 ; 27.305,-6.822 27.518,-6.822 ; 27.518,-4.318 27.518,-6.822 ; 35.138,-22.279 33.36,-20.501 33.36,-16.31 34.63,-15.04 34.63,-14.405 34.63,-13.934 27.518,-6.822
"NetC1_Celda D2_1": "C1_Celda D2.1" "R1_Celda D2.2" "R2_Celda D2.1" "R3_Celda D2.2" "R4_Celda D2.1" | length 11.1
  Bottom Layer w0.5: 82.763,-3.991 82.763,-11.503 84.795,-13.535 84.795,-14.26
"NetC1_Celda D2_2": "C1_Celda D2.2" "R1_Celda B2.1" "R3_Celda B2.1" "R6_Celda D2.1" U1_FR.7 | length 46.5
  Bottom Layer w0.5: U1_FR.7@63.881,-31.623 63.881,-30.76 69.527,-25.114 79.588,-25.114 82.55,-22.152 82.337,-22.152 82.242,-22.152 ; 74.844,-6.35 74.844,-6.868 82.255,-14.278 82.255,-14.913 80.645,-16.523 80.645,-20.035 82.763,-22.152 ; 75.057,-6.695 75.27,-6.695 75.27,-4.191
"NetC2_Celda B1_1": "C2_Celda B1.1" "R2_Celda B1.2" "R4_Celda B1.2" U1_FAA.10 | length 41.1
  Bottom Layer w0.5: U1_FAA.10@8.89,-36.83 U1_FAA.10 21.276,-24.19 27.617,-24.19 29.709,-22.098 29.709,-16.271 28.026,-14.587 28.026,-12.337 27.518,-11.829 27.518,-9.325
"NetC2_Celda B2_1": "C2_Celda B2.1" "R2_Celda B2.2" "R4_Celda B2.2" U1_FR.10 | length 52.4
  Bottom Layer w0.5: U1_FR.10@56.515,-36.703 56.261,-36.703 68.901,-24.063 75.242,-24.063 ; 75.27,-9.198 75.27,-11.702 75.778,-12.21 75.778,-14.46 77.461,-16.144 77.461,-21.971 75.369,-24.063 75.242,-24.063 ; 75.651,-14.46 77.334,-16.144 77.334,-21.971 75.242,-24.063
"NetC2_Celda C1_1": "C2_Celda C1.1" "R2_Celda C1.2" "R4_Celda C1.2" pad.5 pad.6 U1_FAA.3 | length 49
  Top Layer w0.5: pad.5 15.494,-22.86 18.415,-25.781 18.415,-35.932 20.939,-38.456 20.939,-43.187 20.701,-43.425 pad.6
  Bottom Layer w0.5: 13.081,-14.551 13.081,-12.301 12.573,-11.793 12.573,-9.289 12.573,-9.271 pad.5 ; U1_FAA.3 16.637,-41.91 19.05,-44.323 pad.6@20.193,-44.323
"NetC2_Celda C2_1": "C2_Celda C2.1" "R2_Celda C2.2" "R4_Celda C2.2" pad.14 pad.16 U1_FR.3 | length 53.5
  Top Layer w0.5: pad.16 62.611,-24.638 67.297,-29.324 67.297,-31.914 67.945,-32.562 67.945,-37.973 68.474,-38.502 68.474,-43.159 pad.14
  Bottom Layer w0.5: 60.239,-11.666 60.239,-9.162 61.359,-9.162 pad.16 ; 60.452,-11.666 60.96,-12.174 60.96,-14.424 ; U1_FR.3@63.881,-41.783 64.262,-41.783 66.675,-44.196 pad.14 67.818,-44.196
"NetC2_Celda D1_1": "C2_Celda D1.1" "R2_Celda D1.2" "R4_Celda D1.2" U1_FAA.5 | length 51.4
  Bottom Layer w0.5: U1_FAA.5 19.685,-33.401 19.685,-29.591 22.527,-26.749 42.466,-26.749 44.069,-25.146 44.069,-15.191 43.266,-14.387 43.266,-12.138 42.758,-11.63 42.758,-9.126
"NetC2_Celda D2_1": "C2_Celda D2.1" "R2_Celda D2.2" "R4_Celda D2.2" U1_FR.5 | length 52.6
  Bottom Layer w0.5: U1_FR.5@63.881,-36.703 67.31,-33.274 67.31,-29.464 70.152,-26.622 90.091,-26.622 91.694,-25.019 91.694,-15.064 90.891,-14.26 90.891,-12.011 90.383,-11.503 90.383,-8.999 ; 90.465,-14.061 91.269,-14.864
NetC3_FAA_1: C3_FAA.1 R10_FAA.1 R11_FAA.1 R12_FAA.1 U2_FAA.2 | length 17.1
  Bottom Layer w0.5: C3_FAA.1 37.329,-36.576 C3_FAA.1@37.456,-36.703 ; U2_FAA.2 40.259,-41.012 39.608,-40.361 39.608,-38.855 C3_FAA.1@37.456,-36.703 ; R10_FAA.1 R11_FAA.1 R12_FAA.1 C3_FAA.1@37.456,-36.703
NetC3_FAA_2: C3_FAA.2 R14_FAA.3 R15_FAA.1 U2_FAA.1 | length 49
  Bottom Layer w0.5: R15_FAA.1 29.972,-36.576 C3_FAA.2 35.203,-36.044 35.203,-35.494 35.941,-34.756 35.941,-31.623 R14_FAA.3 34.671,-27.559 48.489,-27.559 49.022,-28.092 49.022,-37.846 44.577,-42.291 U2_FAA.1
NetC3_FR_1: C3_FR.1 R10_FR.1 R11_FR.1 R12_FR.1 U2_FR.2 | length 17.1
  Bottom Layer w0.5: C3_FR.1 84.954,-36.449 C3_FR.1@85.081,-36.576 ; U2_FR.2@87.884,-42.164 87.884,-40.885 87.233,-40.234 87.233,-38.728 C3_FR.1@85.081,-36.576 ; R10_FR.1@95.123,-36.576 C3_FR.1@85.081,-36.576
NetC3_FR_2: C3_FR.2 R14_FR.3 R15_FR.1 U2_FR.1 | length 49.2
  Bottom Layer w0.5: R15_FR.1@77.089,-36.957 77.597,-36.449 C3_FR.2 82.828,-35.917 82.828,-35.367 83.566,-34.629 83.566,-31.496 R14_FR.3 82.296,-27.432 96.114,-27.432 96.901,-28.219 96.901,-37.465 92.202,-42.164 U2_FR.1@90.424,-42.164
NetC4_FAA_1: C4_FAA.1 R16_FAA.2 R17_FAA.2 U2_FAA.9 | length 43.3
  Bottom Layer w0.5: R16_FAA.2 24.13,-29.591 R17_FAA.2 ; U2_FAA.9 23.241,-43.053 23.241,-38.329 23.003,-38.091 23.003,-30.877 R17_FAA.2 ; C4_FAA.1 34.671,-32.648 29.983,-27.96 22.536,-27.96 21.717,-28.779 R17_FAA.2
NetC4_FAA_2: C4_FAA.2 R10_FAA.2 R11_FAA.2 U2_FAA.8 | length 38.6
  Bottom Layer w0.5: U2_FAA.8 29.21,-51.562 30.988,-51.562 31.369,-51.181 31.369,-40.894 32.004,-40.259 35.052,-40.259 35.957,-39.354 35.957,-35.807 37.211,-34.553 C4_FAA.2 40.45,-33.528 R11_FAA.2 R10_FAA.2
NetC4_FR_1: C4_FR.1 R16_FR.2 R17_FR.2 U2_FR.9 | length 43.3
  Bottom Layer w0.5: R16_FR.2@71.882,-29.337 71.755,-29.464 R17_FR.2@69.342,-29.464 ; U2_FR.9@77.724,-49.784 70.866,-42.926 70.866,-38.202 70.628,-37.964 70.628,-30.75 R17_FR.2@69.342,-29.464 ; C4_FR.1 82.296,-32.521 77.608,-27.833 70.161,-27.833 69.342,-28.652 R17_FR.2@69.342,-29.464
NetC4_FR_2: C4_FR.2 R10_FR.2 R11_FR.2 U2_FR.8 | length 38.6
  Bottom Layer w0.5: U2_FR.8@75.184,-49.784 76.835,-51.435 78.613,-51.435 78.994,-51.054 78.994,-40.767 79.629,-40.132 82.677,-40.132 83.582,-39.227 83.582,-35.68 84.836,-34.426 C4_FR.2 88.075,-33.401 92.519,-28.956 R10_FR.2@95.123,-28.956
NetC5_1: C5.1 U4.5 | length 4.8
  Bottom Layer w0.5: C5.1 41.252,-79.017 U4.5
NetC6_1: C6.1 T1.2 | length 13.4
  Bottom Layer w0.5: T1.2 47.625,-93.091 51.689,-89.027 C6.1
NetC9_2: C9.2 U7.6 | length 7
  Bottom Layer w0.5: U7.6 41.656,-91.313 C9.2
NetD1_2: D1.2 R27.2 T1.1 | length 34.5
  Top Layer w0.5: T1.1 48.133,-90.551 52.324,-86.36 R27.2 53.848,-80.772 73.025,-80.772 D1.2
NetJ2_1: J2.1 R17_FAA.1 | length 70.2
  Top Layer w0.5: R17_FAA.1 21.717,-34.163 19.939,-32.385 19.939,-25.273 17.018,-22.352 17.018,-8.382 14.986,-6.35 14.986,-2.921 16.383,-1.524 J2.1
"NetR1_Celda C1_1": "R1_Celda C1.1" "R3_Celda C1.1" pad.4 R13_FAA.2 R16_FAA.1 U2_FAA.7 | length 91
  Top Layer w0.5: pad.4 17.789,-3.937 18.916,-2.81 43.26,-2.81 45.005,-4.556 45.005,-22.432 42.037,-25.4 30.654,-25.4 28.114,-27.94 28.114,-30.968 26.86,-32.222 R13_FAA.2
  Bottom Layer w0.5: 12.573,-6.785 12.573,-4.282 pad.4@17.272,-4.282 ; R16_FAA.1 R13_FAA.2 27.456,-37.68 27.456,-42.188 U2_FAA.7
"NetR1_Celda C2_1": "R1_Celda C2.1" "R3_Celda C2.1" pad.17 R13_FR.2 R16_FR.1 U2_FR.7 | length 47
  Top Layer w0.5: pad.17@64.135,-8.636 64.135,-25.096 68.051,-29.011 68.051,-31.602 71.882,-35.433 R16_FR.1
  Bottom Layer w0.5: 60.239,-4.155 60.239,-6.658 62.049,-6.658 pad.17 ; R16_FR.1@71.882,-36.957 74.486,-36.957 75.044,-37.515 75.044,-42.024 U2_FR.7@75.184,-42.164
"NetR1_Celda D1_1": "R1_Celda D1.1" "R3_Celda D1.1" pad.3 R8_FAA.2 U1_FAA.14 | length 90
  Top Layer w0.5: pad.3 6.731,-48.26 26.153,-48.26 31.353,-43.06 31.353,-38.285 31.472,-38.166 31.472,-28.321 32.869,-26.924 43.41,-26.924 48.363,-21.971 48.363,-5.691 R8_FAA.2
  Bottom Layer w0.5: pad.3@6.604,-48.895 6.604,-48.641 8.255,-46.99 U1_FAA.14 ; 42.672,-4.118 42.672,-3.991 42.545,-4.118 42.745,-4.318 42.758,-4.318 ; 42.758,-6.622 42.758,-4.318 ; R8_FAA.2 42.758,-4.318
"NetR1_Celda D2_1": "R1_Celda D2.1" "R3_Celda D2.1" pad.10 R8_FR.2 U1_FR.14 | length 90
  Top Layer w0.5: pad.10@53.975,-48.514 54.356,-48.133 73.778,-48.133 78.207,-43.705 78.243,-43.705 78.978,-42.97 78.978,-42.933 79.01,-42.901 79.01,-41.431 79.134,-41.307 79.134,-36.322 79.097,-36.285 79.097,-30.434 79.134,-30.397 79.134,-28.702 79.097,-28.665 79.097,-28.194 80.494,-26.797 91.035,-26.797 95.988,-21.844 95.988,-5.564 R8_FR.2@94.615,-4.191
  Bottom Layer w0.5: pad.10 54.229,-48.514 55.88,-46.863 U1_FR.14 U1_FR.14@56.261,-46.863 ; 89.957,-3.991 90.17,-3.991 ; 90.383,-6.495 90.383,-4.191 90.37,-4.191 90.17,-3.991 ; 90.722,-4.191 R8_FR.2@94.615,-4.191 ; 90.17,-3.991 90.297,-3.991 90.297,-3.864 90.17,-3.991
"NetR5_Celda B1_1": "R5_Celda B1.1" "R6_Celda B1.2" | length 2.5
  Bottom Layer w0.5: 27.518,-22.479 27.518,-19.975
"NetR5_Celda B1_2": "R5_Celda B1.2" "R7_Celda B1.2" U1_FAA.9 | length 29.5
  Bottom Layer w0.5: U1_FAA.9 9.897,-34.29 21.189,-22.998 21.189,-21.479 19.685,-19.975 ; 19.898,-19.975 22.274,-19.975 24.778,-17.472 27.305,-17.472 27.518,-17.472
"NetR5_Celda B2_1": "R5_Celda B2.1" "R6_Celda B2.2" | length 2.5
  Bottom Layer w0.5: 75.27,-22.352 75.27,-19.848
"NetR5_Celda B2_2": "R5_Celda B2.2" "R7_Celda B2.2" U1_FR.9 | length 33.2
  Bottom Layer w0.5: U1_FR.9@56.261,-34.163 57.522,-34.163 68.814,-22.871 68.814,-21.352 67.31,-19.848 ; 67.437,-19.848 68.941,-21.352 68.941,-22.871 ; 67.65,-19.848 70.026,-19.848 72.53,-17.345 74.844,-17.345 75.27,-17.345
"NetR5_Celda C1_1": "R5_Celda C1.1" "R6_Celda C1.2" | length 2.5
  Bottom Layer w0.5: 12.573,-22.443 12.573,-19.939
"NetR5_Celda C1_2": "R5_Celda C1.2" "R7_Celda C1.2" U1_FAA.2 | length 39.1
  Bottom Layer w0.5: 12.573,-17.435 9.833,-17.435 7.33,-19.939 4.953,-19.939 6.592,-21.578 6.592,-36.945 7.763,-38.116 9.405,-38.116 15.739,-44.45 U1_FAA.2
"NetR5_Celda C2_1": "R5_Celda C2.1" "R6_Celda C2.2" | length 2.5
  Bottom Layer w0.5: 60.452,-22.316 60.452,-19.812
"NetR5_Celda C2_2": "R5_Celda C2.2" "R7_Celda C2.2" U1_FR.2 | length 41.4
  Bottom Layer w0.5: 52.873,-19.903 54.513,-21.542 ; 54.217,-21.451 54.217,-36.818 55.388,-37.989 57.03,-37.989 63.364,-44.323 U1_FR.2 U1_FR.2@63.881,-44.323 ; 54.471,-21.451 52.832,-19.812 55.209,-19.812 57.712,-17.308 60.239,-17.308 60.452,-17.308
"NetR5_Celda D1_1": "R5_Celda D1.1" "R6_Celda D1.2" | length 2.5
  Bottom Layer w0.5: 42.758,-22.279 42.758,-19.776
"NetR5_Celda D1_2": "R5_Celda D1.2" "R7_Celda D1.2" U1_FAA.6 | length 46.8
  Bottom Layer w0.5: U1_FAA.6 18.931,-31.615 18.931,-29.279 22.215,-25.995 39.918,-25.995 41.148,-24.765 41.148,-22.906 41.041,-22.799 41.041,-18.776 42.545,-17.272 40.018,-17.272 37.514,-19.776 35.138,-19.776
"NetR5_Celda D2_1": "R5_Celda D2.1" "R6_Celda D2.2" | length 2.5
  Bottom Layer w0.5: 90.383,-22.152 90.383,-19.649
"NetR5_Celda D2_2": "R5_Celda D2.2" "R7_Celda D2.2" U1_FR.6 | length 46.7
  Bottom Layer w0.5: U1_FR.6@63.881,-34.163 66.556,-31.488 66.556,-29.152 69.84,-25.868 87.543,-25.868 88.241,-25.17 88.241,-18.449 89.545,-17.145 ; 82.763,-19.649 85.139,-19.649 87.643,-17.145 89.545,-17.145 ; 89.745,-16.945 89.545,-17.145 ; 90.17,-17.145 89.957,-17.145 89.545,-17.145
NetR8_FAA_1: pad.2 R8_FAA.1 R9_FAA.2 U1_FAA.13 | length 79.7
  Top Layer w0.5: pad.2 6.35,-45.704 26.686,-45.704 28.845,-43.545 28.845,-39.726 30.718,-37.853 30.718,-28.009 32.565,-26.162 42.799,-26.162 46.99,-21.971 R8_FAA.1
  Bottom Layer w0.5: pad.2@6.35,-45.339 7.239,-44.45 U1_FAA.13 10.668,-46.482 10.668,-48.768 R9_FAA.2
NetR8_FR_1: pad.11 R8_FR.1 R9_FR.2 U1_FR.13 | length 79.7
  Top Layer w0.5: pad.11@53.975,-45.466 53.975,-45.577 74.311,-45.577 76.47,-43.418 76.47,-40.513 78.38,-38.603 78.38,-36.635 78.343,-36.597 78.343,-27.882 80.19,-26.035 90.424,-26.035 94.615,-21.844 R8_FR.1 R8_FR.1@94.615,-11.811
  Bottom Layer w0.5: pad.11@53.975,-45.212 54.864,-44.323 U1_FR.13 56.261,-44.323 58.293,-46.355 58.293,-48.641 R9_FR.2@56.007,-50.927
NetR12_FAA_2: R12_FAA.2 R14_FAA.1 R14_FAA.2 | length 6.7
  Bottom Layer w0.5: R14_FAA.2 R14_FAA.1 38.481,-29.083 R12_FAA.2
NetR12_FR_2: R12_FR.2 R14_FR.1 R14_FR.2 | length 6.7
  Bottom Layer w0.5: R14_FR.2 R14_FR.1 86.106,-28.956 R12_FR.2@90.043,-28.956
NetR13_FAA_1: R13_FAA.1 R15_FAA.2 U2_FAA.6 | length 16.8
  Bottom Layer w0.5: R15_FAA.2 R13_FAA.1 28.21,-30.814 28.21,-40.402 U2_FAA.6
NetR13_FR_1: R13_FR.1 R15_FR.2 U2_FR.6 | length 16.8
  Bottom Layer w0.5: R15_FR.2@77.089,-29.337 74.486,-29.337 75.819,-30.67 75.819,-36.613 75.798,-36.635 75.798,-40.238 U2_FR.6@77.724,-42.164
NetR17_FR_1: pad.20 pad.21 R17_FR.1 U8.14 | length 98.5
  Top Layer w0.5: pad.20 57.023,-29.972 62.484,-35.433 65.024,-35.433 pad.21
  Bottom Layer w0.5: U8.14 21.336,-72.461 21.336,-66.04 23.876,-63.5 42.291,-63.5 46.99,-58.801 46.99,-56.769 49.911,-53.848 49.911,-38.735 50.419,-38.227 50.419,-37.084 51.054,-36.449 pad.20@51.054,-30.099 ; pad.21@66.294,-36.83 66.761,-37.297 R17_FR.1
NetR18_2: R18.2 R19.2 U3.3 | length 13
  Bottom Layer w0.5: U3.3 71.755,-79.883 R19.2 R18.2
NetR19_1: R19.1 R22.2 | length 2.2
  Bottom Layer w0.5: R22.2 R19.1
NetR20_1: R20.1 R23.2 | length 2.9
  Bottom Layer w0.5: R23.2 R20.1
NetR21_2: R21.2 R24.2 U5.3 | length 18.7
  Bottom Layer w0.5: U5.3 55.411,-71.151 55.411,-70.276 58.758,-66.929 R24.2 R21.2
NetR23_1: R23.1 T1.3 | length 4.6
  Top Layer w0.5: T1.3 50.038,-93.472 R23.1
  Bottom Layer w0.5: R23.1@53.213,-93.091 R23.1
NetR24_1: R24.1 R25.2 | length 4.8
  Bottom Layer w0.5: R25.2 R24.1
NetR26_1: R26.1 U4.2 U4.6 U6.3 | length 53
  Bottom Layer w0.5: R26.1 30.734,-70.816 33.632,-73.714 U4.2 ; U4.6 36.172,-76.327 U4.2 ; U6.3 55.403,-77.601 51.804,-77.601 51.681,-77.724 51.562,-77.605 51.562,-77.47 49.276,-75.184 49.276,-72.517 45.847,-69.088 43.18,-69.088 39.497,-65.405 37.592,-65.405 36.322,-66.675 36.322,-71.097 U4.2
NetR26_2: R26.2 U4.7 | length 7.9
  Bottom Layer w0.5: R26.2 38.354,-70.889 U4.7
NetU3_2: U3.2 U5.2 U6.1 U6.2 | length 20.1
  Bottom Layer w0.5: U5.2 55.314,-73.787 U6.2 ; U6.1 U6.2 ; U3.2 66.087,-73.787 64.821,-72.521 63.772,-72.521 62.506,-73.787 U6.2
NetU7_5: U7.5 U8.3 | length 38.3
  Bottom Layer w0.5: U8.3 19.558,-83.383 19.558,-95.123 21.082,-96.647 37.973,-96.647 U7.5
pwm: U5.7 U7.7 | length 23.5
  Bottom Layer w0.5: U7.7 39.116,-87.122 39.116,-85.471 40.64,-83.947 45.974,-83.947 49.276,-80.645 49.276,-78.105 47.498,-76.327 U5.7
VCC: C8.1 Cdes1_FAA.1 Cdes1_FR.1 Cdes4_FAA.2 Cdes4_FR.2 J1.1 U6.8 U7.1 U8.16 | length 314
  Top Layer w0.5: Cdes1_FAA.1 17.771,-42.418 17.025,-43.164 6.989,-43.164 5.084,-45.069 5.084,-49.779 8.645,-53.34 32.131,-53.34 33.925,-51.546 33.925,-48.498 36.068,-46.355 40.132,-46.355 41.513,-44.974 41.513,-41.522 40.894,-40.903 Cdes4_FAA.2 51.317,-39.624 52.317,-40.624 53.855,-40.624 53.95,-40.529 59.468,-40.529 61.976,-43.037 ; C8.1 28.321,-69.215 43.434,-69.215 46.99,-65.659 46.99,-60.325 55.041,-52.274 55.041,-52.197 ; Cdes1_FR.1 65.396,-42.291 64.65,-43.037 61.976,-43.037 ; Cdes4_FR.2 88.519,-40.776 89.138,-41.395 89.138,-44.847 87.757,-46.228 83.693,-46.228 81.55,-48.371 81.55,-51.419 80.772,-52.197 55.041,-52.197 ; 55.041,-52.197 52.709,-49.865 52.709,-44.942 54.614,-43.037 61.976,-43.037
  Bottom Layer w0.5: C8.1 29.718,-74.168 U8.16 31.25,-77.295 31.25,-78.275 33.147,-80.172 U7.1 ; U6.8 64.297,-70.704 65.786,-69.215 68.961,-69.215 69.977,-68.199 69.977,-66.675 68.58,-65.278 50.165,-65.278 48.768,-63.881 48.768,-58.42 52.451,-54.737 89.662,-54.737 91.821,-52.578 91.821,-48.26 89.138,-45.577 89.138,-40.116 Cdes4_FR.2
VEE: C7.1 Cdes2_FAA.2 Cdes2_FR.2 Cdes3_FAA.1 Cdes3_FR.1 J1.2 U6.4 U7.4 U8.7 | length 287.5
  Top Layer w0.5: J1.2 19.939,-55.372 44.196,-55.372 45.212,-56.388 45.212,-58.37 44.839,-58.743 44.839,-58.92 42.799,-60.96 42.749,-60.96 42.114,-61.595 22.987,-61.595 19.685,-64.897 19.685,-94.996 21.336,-96.647 35.941,-96.647 ; U7.4 35.941,-96.647 ; Cdes3_FAA.1 43.561,-52.324 48.641,-47.244 48.641,-46.355 Cdes2_FR.2 ; C7.1 59.944,-92.456 55.753,-96.647 35.941,-96.647
  Bottom Layer w0.5: Cdes2_FAA.2@5.842,-42.037 4.064,-43.815 4.064,-49.826 7.832,-53.594 14.986,-53.594 17.018,-55.626 J1.2 22.606,-55.626 24.638,-53.594 36.576,-53.594 Cdes3_FAA.1 ; U8.7 20.844,-92.257 20.844,-94.063 21.912,-95.131 31.869,-95.131 U7.4 ; Cdes2_FR.2@53.467,-41.91 51.689,-43.688 51.689,-50.038 55.118,-53.467 84.201,-53.467 Cdes3_FR.1 ; U6.4 63.789,-85.979 65.913,-85.979 67.056,-87.122 67.056,-88.265 65.278,-90.043 61.087,-90.043 C7.1
pads on no net: U2_FAA.12 U2_FAA.13 U2_FAA.14 U2_FR.12 U2_FR.13 U2_FR.14 U3.5 U3.6 U4.3 U5.5 U5.6 U6.5 U6.6 U6.7 U7.2 U8.1 U8.2 U8.4 U8.5 U8.12 U8.13 U8.15
copper on no net: | length 0
  Bottom Layer w0.5: 82.804,-49.821 82.804,-49.784

## Polygon pours and split planes (outlines as drawn)
Ground_FAA on Bottom Layer "GROUND_FAA_L02_P020" (solid, remove dead copper, pour order 20): -0.127,-100.076 -0.127,0.127 0,0 100.076,0 100.076,-99.822 99.822,-100.076 99.695,-99.949 -0.381,-99.949

## Text inside footprints (layer, text, board x,y; h text height)
U7: Top Overlay "TOL" at 36.957,-90.043 h1.27; Top Overlay "VAL" at 36.957,-90.043 h1.27; Top Overlay "DEV" at 36.957,-90.043 h1.27; Top Overlay "PN" at 36.957,-90.043 h1.27; Top Overlay "*" at 33.147,-84.785 h1.27; Mechanical 13 "RefDes2" at 36.957,-90.043 h1.27; Mechanical 13 "*" at 33.147,-84.785 h1.27